# EAGLE board m (EAGLE 7.1.0)
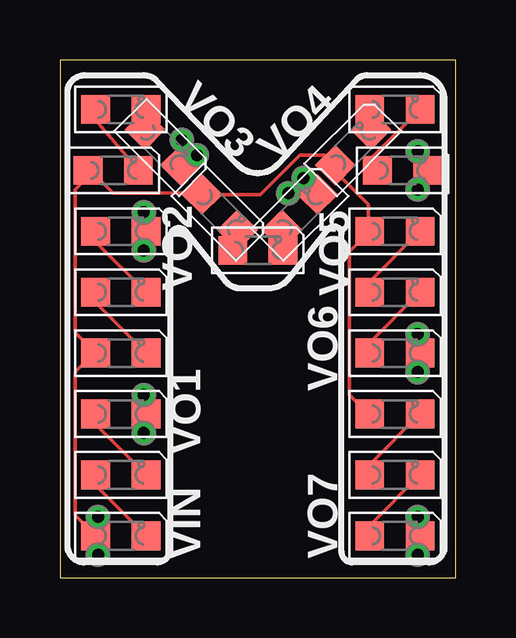
[diagram p0: board, top side]

Size 16.51 x 21.59 mm. Coordinates in mm from the lower left corner, seen from the top.
Outline: 0,0 16.51,0 16.51,21.59 0,21.59 0,0
Copper layers (1*16): Top 0.035mm / dielectric 1.5mm / Bottom 0.035mm
Design rules "Fusion_eagle_rule_v1.1_tms *": minimum track width 6mil, minimum drill 12mil, track to track 6mil, track to pad 6mil, pad to pad 6mil, via to via 6mil, smd to smd 0mil, copper to edge 10mil, drill to drill 10mil, minimum pad ring 10mil, minimum via ring 6mil, stop-mask expansion 2mil, vias tented up to drill 100mil, thermal gap 10mil

## Footprints (pad centres in the part's own frame; a part is rotated, then mirrored left to right if it is on the bottom)
LED_0805 = smd 1.2 x 1.2: A 0,-1.05; C 0,1.05
P1-20 = drill 0.5: TP 0,0

## Placement (x,y rotation side)
LED1  [LED_0805]  2.54,1.75 270 top
LED2  [LED_0805]  2.54,4.29 270 top
LED3  [LED_0805]  2.54,6.83 270 top
LED4  [LED_0805]  2.54,9.37 270 top
LED5  [LED_0805]  2.54,11.91 270 top
LED6  [LED_0805]  2.54,14.45 270 top
LED7  [LED_0805]  2.22,16.99 270 top
LED8  [LED_0805]  2.54,19.53 270 top
LED9  [LED_0805]  4.29,17.94 225 top
LED10  [LED_0805]  6.67,15.24 225 top
LED11  [LED_0805]  8.26,13.65 270 top
LED12  [LED_0805]  10,15.24 315 top
LED13  [LED_0805]  12.22,17.94 315 top
LED14  [LED_0805]  13.97,19.53 270 top
LED15  [LED_0805]  14.29,16.99 270 top
LED16  [LED_0805]  13.97,14.45 270 top
LED17  [LED_0805]  13.97,11.91 270 top
LED18  [LED_0805]  13.97,9.37 270 top
LED19  [LED_0805]  13.97,6.83 270 top
LED20  [LED_0805]  13.97,4.29 270 top
LED21  [LED_0805]  13.97,1.75 270 top
VIN  [P1-20]  1.59,0.95 0 top
VIN1  [P1-20]  1.59,2.54 0 top
VO1  [P1-20]  3.49,7.62 0 top
VO2  [P1-20]  3.49,15.24 0 top
VO3  [P1-20]  5.71,17.62 0 top
VO4  [P1-20]  10.16,16.67 0 top
VO5  [P1-20]  14.92,16.19 0 top
VO6  [P1-20]  14.92,10.16 0 top
VO7  [P1-20]  14.92,0.95 0 top
VO08  [P1-20]  3.49,6.03 0 top
VO09  [P1-20]  3.49,13.65 0 top
VO10  [P1-20]  5.08,18.26 0 top
VO11  [P1-20]  9.53,16.03 0 top
VO12  [P1-20]  14.92,17.78 0 top
VO13  [P1-20]  14.92,8.57 0 top
VO14  [P1-20]  14.92,2.54 0 top

## Library data of the parts
LED1-LED21 VIN VIN1 VO1-VO7 VO08 VO09 VO10-VO14 = CyberRailGuru

## Nets
N$1: LED19.C LED20.A
N$2: LED20.C LED21.A
N$39: LED2.C LED3.A
N$40: LED1.C LED2.A
N$41: LED5.C LED6.A
N$42: LED4.C LED5.A
N$43: LED8.C LED9.A
N$44: LED7.C LED8.A
N$45: LED11.C LED12.A
N$46: LED10.C LED11.A
N$47: LED14.C LED15.A
N$48: LED13.C LED14.A
N$49: LED17.C LED18.A
N$50: LED16.C LED17.A
VIN: LED1.A LED4.A LED7.A LED10.A LED13.A LED16.A LED19.A VIN1.TP VIN.TP
VOUT1: LED3.C VO1.TP VO08.TP
VOUT2: LED6.C VO2.TP VO09.TP
VOUT3: LED9.C VO3.TP VO10.TP
VOUT4: LED12.C VO4.TP VO11.TP
VOUT5: LED15.C VO5.TP VO12.TP
VOUT6: LED18.C VO6.TP VO13.TP
VOUT7: LED21.C VO7.TP VO14.TP

## Tracks (layer width: path | path; a pad name or v marks a point on that pad's centre or on a via)
N$1
  Top 0.152: LED20.A 12.92,4.73 LED19.C
N$2
  Top 0.152: LED21.A 12.92,2.19 LED20.C
N$39
  Top 0.152: LED3.A 1.49,6.39 LED2.C
N$40
  Top 0.152: LED2.A 1.49,3.85 LED1.C
N$41
  Top 0.152: LED6.A 1.49,14.01 LED5.C
N$42
  Top 0.152: LED5.A 1.49,11.47 LED4.C
N$43
  Top 0.152: LED8.C 3.59,18.73 LED9.A
N$44
  Top 0.152: LED8.A 1.49,19.09 LED7.C
N$45
  Top 0.152: LED12.A 9.26,13.86 LED11.C
N$46
  Top 0.152: LED10.C 7.41,13.7 LED11.A
N$47
  Top 0.152: LED15.A 12.92,17.43 LED14.C
N$48
  Top 0.152: LED14.A 12.92,18.73 LED13.C
N$49
  Top 0.152: LED18.A 12.92,9.81 LED17.C
N$50
  Top 0.152: LED17.A 12.92,12.35 LED16.C
VIN
  Top 0.152: LED7.A 1.43,16.99 0.64,16.19 0.64,10.22 LED4.A 1.43,9.37 0.64,8.57 0.64,2.6 LED1.A | LED7.A 1.49,17.24 | LED19.A 12.86,6.83 12.06,7.62 12.06,13.59 LED16.A 12.86,14.51 12.86,15.56 11.48,16.93 LED13.A 11.06,17.62 10,17.62 8.36,15.98 LED10.A 5.87,16.03 2.22,16.03 1.27,16.99 LED7.A | VIN1.TP 1.59,1.84 LED1.A | VIN.TP 1.59,1.65 LED1.A
VOUT1
  Top 0.152: VO1.TP 3.49,6.92 LED3.C 3.49,6.73 VO08.TP
VOUT2
  Top 0.152: VO09.TP 3.49,14.35 LED6.C 3.49,14.54 VO2.TP
VOUT3
  Top 0.152: LED9.C 5.08,17.25 VO10.TP VO3.TP
VOUT4
  Top 0.152: VO11.TP VO4.TP 10.16,16.57 LED12.C
VOUT5
  Top 0.152: VO12.TP 14.92,17.4 LED15.C 14.92,16.57 VO5.TP
VOUT6
  Top 0.152: VO6.TP 14.92,9.46 LED18.C 14.92,9.27 VO13.TP
VOUT7
  Top 0.152: VO14.TP 14.92,1.84 LED21.C 14.92,1.65 VO7.TP

## Text on the board
201bmp: M